# Altium PCB AimLab_TestStationD-v1 (1).~3.1-150922.~3.1-150922.PcbDoc
Units mil, origin at the board's own origin, x right, y up, seen from the top; angles counter-clockwise.
Board outline 6000 x 2640 mil, 2 copper layers (Top Layer, Bottom Layer); 2 components, 0 nets, 575 pads, 0 vias.
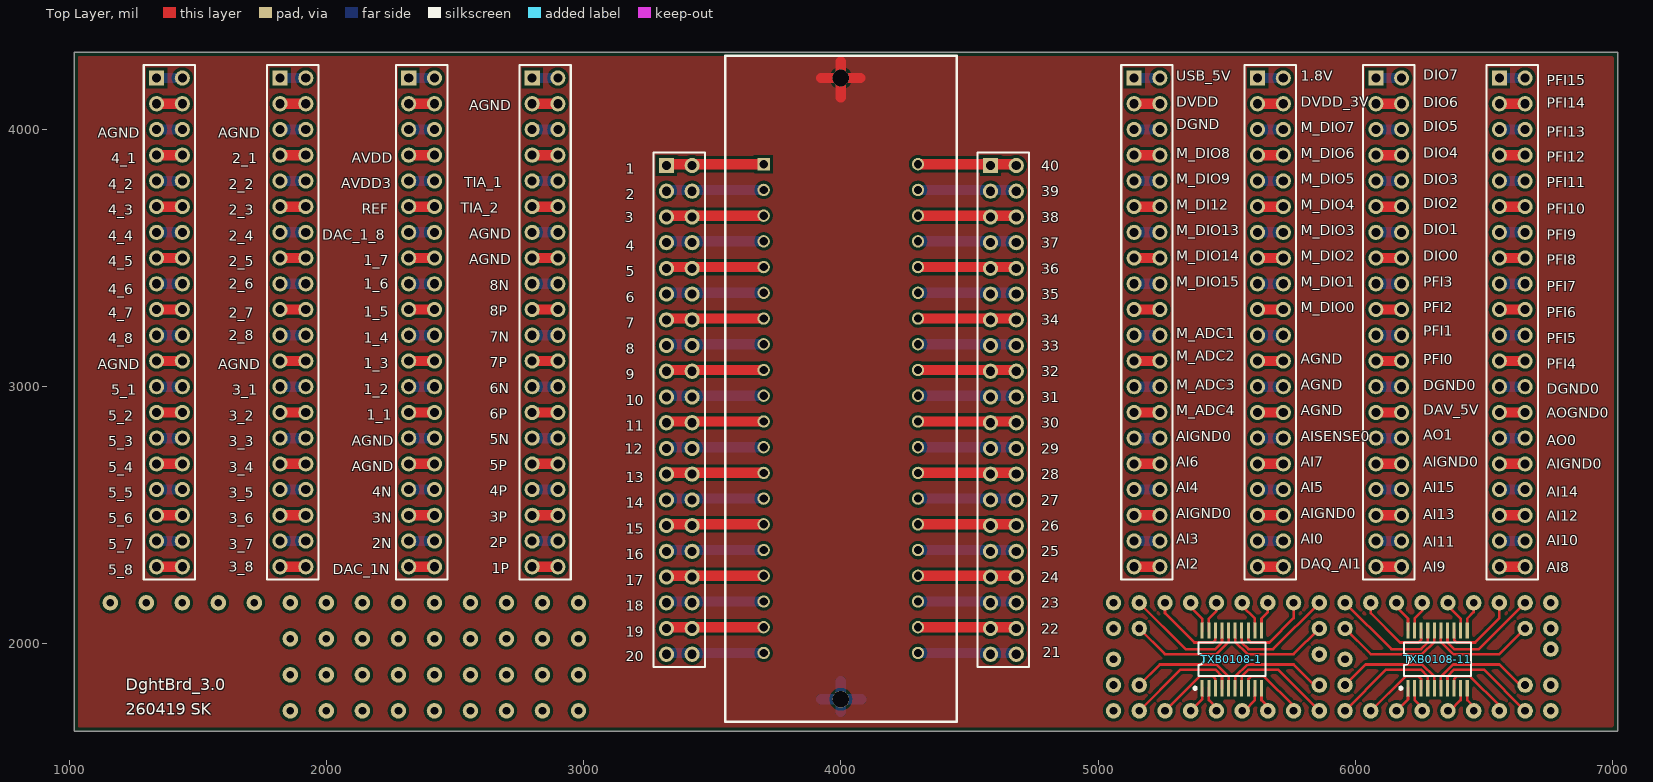
[diagram p0: Top Layer view]
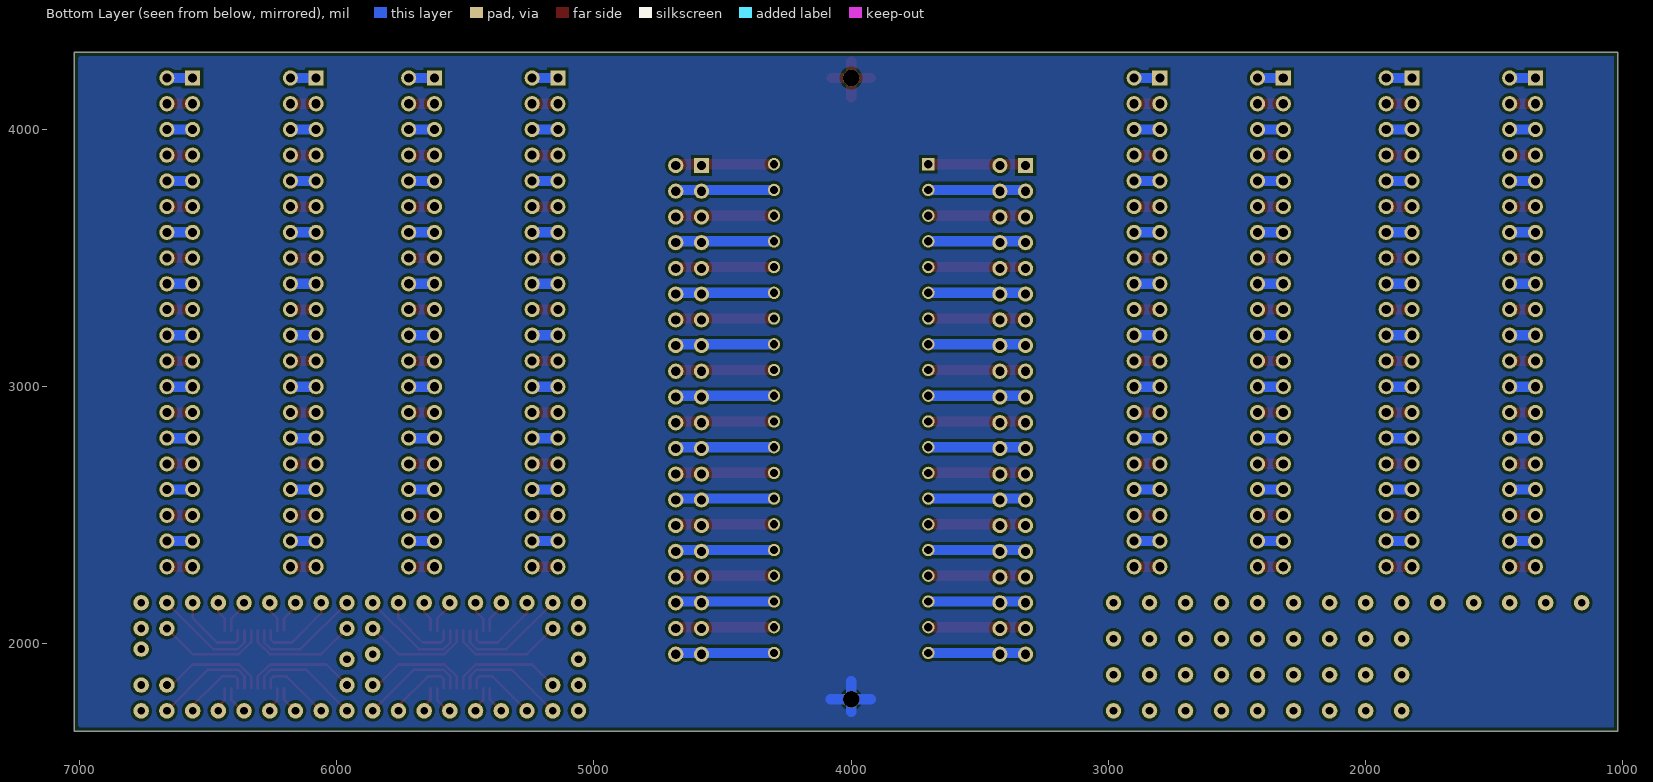
[diagram p1: Bottom Layer view, seen from below]

## Layer stack, top to bottom
Top Solder: solder mask 0.4, Solder Resist, Dk 3.5
Top Layer: signal copper 1.4
Dielectric1: core 12.6, FR-4, Dk 4.8
Bottom Layer: signal copper 1.4
Bottom Solder: solder mask 0.4, Solder Resist, Dk 3.5

## Board outline
1020,1660 7020,1660 7020,4300 1020,4300

## Design rules (kind name [scope] priority, off if disabled: settings)
Clearance [All] p1: gap=12 ignorepadtopadclearanceinfootprint=FALSE
FabricationTestPointUsage TestPointUsage [All] p1: valid=0 allowmultiple=FALSE
FabricationTestpoint Testpoint [All] p1: side=3 testpointundercomponent=TRUE minsize=40 maxsize=100 preferedsize=60 minholesize=0 maxholesize=40 preferedholesize=32 testpointgrid=1 allowsidetop=TRUE allowsidebottom=TRUE usegrid=TRUE gridtolerance=0.01
PolygonConnect [All] p1: connectstyle=Relief reliefconductorwidth=10 reliefentries=4 polygonreliefangle="90 Angle" airgapwidth=10
RoutingVias [All] p1: holewidth=28 width=50 viastyle="Through Hole" minholewidth=8 minwidth=10 maxholewidth=75 maxwidth=80
ShortCircuit [All] p1: allowed=TRUE
SolderMaskExpansion [All] p1: expansion=4 istentingtop=FALSE
Width [All] p1: maxlimit=80 minlimit=10 preferedwidth=40
27 further rules are at their usual default settings.

## Components (designator, comment, footprint, x,y, rotation, side; value= is the part's Value field where it differs from the comment)
TXB0108-1 "Translational Buffer" TSSO6x6-G20/D6.6 5520,1940 r0 top
TXB0108-11 "Translational Buffer" TSSO6x6-G20/D6.6 6320,1940 r0 top

## Footprints (in the part's own frame and the unit in brackets; to place one, negate y for a bottom-side part, rotate by r counter-clockwise, add the part's x,y. Pads: shape width x height; smd on the part's side, far side on the other; paste and mask are expansions set on the pad)
TSSO6x6-G20/D6.6 [mm] "Shrink Small Outline; 20 Leads; Body Width 4.4 mm; Pitch 0.65 mm"
  rect 0.3x1.6 smd: 1(-2.925,-2.85) 2(-2.275,-2.85) 3(-1.625,-2.85) 4(-0.975,-2.85) 5(-0.325,-2.85) 6(0.325,-2.85) 7(0.975,-2.85) 8(1.625,-2.85) 9(2.275,-2.85) 10(2.925,-2.85) 11(2.925,2.85) 12(2.275,2.85) 13(1.625,2.85) 14(0.975,2.85) 15(0.325,2.85) 16(-0.325,2.85) 17(-0.975,2.85) 18(-1.625,2.85) 19(-2.275,2.85) 20(-2.925,2.85)
  silkscreen extent -3.75,-2.97 3.3,1.65

## Free pads (board coordinates)
  round 60 hole 30: 0(1160,2160) 0(5160,1740) 0(5160,1840) 0(5160,2060) 0(5160,2160) 0(5960,1740) 0(5960,1840) 0(5960,2060) 0(5960,2160) 1(1300,2160) 1(5260,1740) 1(5260,2160) 1(6060,1740) 1(6060,2160) 2(1440,2160) 2(5360,1740) 2(5360,2160) 2(6160,1740) 2(6160,2160) 4(1580,2160) 4(5460,1740) 4(5460,2160) 4(6260,1740) 4(6260,2160) 5(1720,2160) 5(5560,1740) 5(5560,2160) 5(6360,1740) 5(6360,2160) 6(1860,1740) 6(1860,1880) 6(1860,2020) 6(1860,2160) 6(5660,1740) 6(5660,2160) 6(6460,1740) 6(6460,2160) 7(2000,1740) 7(2000,1880) 7(2000,2020) 7(2000,2160) 7(5760,1740) 7(5760,2160) 7(6560,1740) 7(6560,2160) 8(2140,1740) 8(2140,1880) 8(2140,2020) 8(2140,2160) 8(5060,1740) 8(5060,2160) 8(5860,1740) 8(5860,2160) 8(6660,1740) 8(6660,2160) 8(6760,1740) 8(6760,2160) 9(2280,1740) 9(2280,1880) 9(2280,2020) 9(2280,2160) 9(5060,1840) 9(5060,1940) 9(5060,2060) 9(5860,1840) 9(5860,1960) 9(5860,2060) 9(5960,1940) 9(6660,1840) 9(6660,2060) 9(6760,1840) 9(6760,1980) 9(6760,2060) 10(2420,1740) 10(2420,1880) 10(2420,2020) 10(2420,2160) 11(2560,1740) 11(2560,1880) 11(2560,2020) 11(2560,2160) 12(2700,1740) 12(2700,1880) 12(2700,2020) 12(2700,2160) 13(2840,1740) 13(2840,1880) 13(2840,2020) 13(2840,2160) 14(2980,1740) 14(2980,1880) 14(2980,2020) 14(2980,2160)
  rect 59.06x59.06 hole 35.43: 1(1340,4200) 1(1820,4200) 1(2320,4200) 1(2800,4200) 1(3321.87,3859.96) 1(4581.87,3859.96) 1(5140,4200) 1(5620,4200) 1(6080,4200) 1(6560,4200)
  rect 48x48 hole 32: 1(3700,3865)
  round 59.06 hole 35.43: 2(1440,4200) 2(1920,4200) 2(2420,4200) 2(2900,4200) 2(3421.87,3859.96) 2(4681.87,3859.96) 2(5240,4200) 2(5720,4200) 2(6180,4200) 2(6660,4200) 3(1340,4100) 3(1820,4100) 3(2320,4100) 3(2800,4100) 3(3321.87,3759.96) 3(4581.87,3759.96) 3(5140,4100) 3(5620,4100) 3(6080,4100) 3(6560,4100) 4(1440,4100) 4(1920,4100) 4(2420,4100) 4(2900,4100) 4(3421.87,3759.96) 4(4681.87,3759.96) 4(5240,4100) 4(5720,4100) 4(6180,4100) 4(6660,4100) 5(1340,4000) 5(1820,4000) 5(2320,4000) 5(2800,4000) 5(3321.87,3659.96) 5(4581.87,3659.96) 5(5140,4000) 5(5620,4000) 5(6080,4000) 5(6560,4000) 6(1440,4000) 6(1920,4000) 6(2420,4000) 6(2900,4000) 6(3421.87,3659.96) 6(4681.87,3659.96) 6(5240,4000) 6(5720,4000) 6(6180,4000) 6(6660,4000) 7(1340,3900) 7(1820,3900) 7(2320,3900) 7(2800,3900) 7(3321.87,3559.96) 7(4581.87,3559.96) 7(5140,3900) 7(5620,3900) 7(6080,3900) 7(6560,3900) 8(1440,3900) 8(1920,3900) 8(2420,3900) 8(2900,3900) 8(3421.87,3559.96) 8(4681.87,3559.96) 8(5240,3900) 8(5720,3900) 8(6180,3900) 8(6660,3900) 9(1340,3800) 9(1820,3800) 9(2320,3800) 9(2800,3800) 9(3321.87,3459.96) 9(4581.87,3459.96) 9(5140,3800) 9(5620,3800) 9(6080,3800) 9(6560,3800) 10(1440,3800) 10(1920,3800) 10(2420,3800) 10(2900,3800) 10(3421.87,3459.96) 10(4681.87,3459.96) 10(5240,3800) 10(5720,3800) 10(6180,3800) 10(6660,3800) 11(1340,3700) 11(1820,3700) 11(2320,3700) 11(2800,3700) 11(3321.87,3359.96) 11(4581.87,3359.96) 11(5140,3700) 11(5620,3700) 11(6080,3700) 11(6560,3700) 12(1440,3700) 12(1920,3700) 12(2420,3700) 12(2900,3700) 12(3421.87,3359.96) 12(4681.87,3359.96) 12(5240,3700) 12(5720,3700) 12(6180,3700) 12(6660,3700) 13(1340,3600) 13(1820,3600) 13(2320,3600) 13(2800,3600) 13(3321.87,3259.96) 13(4581.87,3259.96) 13(5140,3600) 13(5620,3600) 13(6080,3600) 13(6560,3600) 14(1440,3600) 14(1920,3600) 14(2420,3600) 14(2900,3600) 14(3421.87,3259.96) 14(4681.87,3259.96) 14(5240,3600) 14(5720,3600) 14(6180,3600) 14(6660,3600) 15(1340,3500) 15(1820,3500) 15(2320,3500) 15(2800,3500) 15(3321.87,3159.96) 15(4581.87,3159.96) 15(5140,3500) 15(5620,3500) 15(6080,3500) 15(6560,3500) 16(1440,3500) 16(1920,3500) 16(2420,3500) 16(2900,3500) 16(3421.87,3159.96) 16(4681.87,3159.96) 16(5240,3500) 16(5720,3500) 16(6180,3500) 16(6660,3500) 17(1340,3400) 17(1820,3400) 17(2320,3400) 17(2800,3400) 17(3321.87,3059.96) 17(4581.87,3059.96) 17(5140,3400) 17(5620,3400) 17(6080,3400) 17(6560,3400) 18(1440,3400) 18(1920,3400) 18(2420,3400) 18(2900,3400) 18(3421.87,3059.96) 18(4681.87,3059.96) 18(5240,3400) 18(5720,3400) 18(6180,3400) 18(6660,3400) 19(1340,3300) 19(1820,3300) 19(2320,3300) 19(2800,3300) 19(3321.87,2959.96) 19(4581.87,2959.96) 19(5140,3300) 19(5620,3300) 19(6080,3300) 19(6560,3300) 20(1440,3300) 20(1920,3300) 20(2420,3300) 20(2900,3300) 20(3421.87,2959.96) 20(4681.87,2959.96) 20(5240,3300) 20(5720,3300) 20(6180,3300) 20(6660,3300) 21(1340,3200) 21(1820,3200) 21(2320,3200) 21(2800,3200) 21(3321.87,2859.96) 21(4581.87,2859.96) 21(5140,3200) 21(5620,3200) 21(6080,3200) 21(6560,3200) 22(1440,3200) 22(1920,3200) 22(2420,3200) 22(2900,3200) 22(3421.87,2859.96) 22(4681.87,2859.96) 22(5240,3200) 22(5720,3200) 22(6180,3200) 22(6660,3200) 23(1340,3100) 23(1820,3100) 23(2320,3100) 23(2800,3100) 23(3321.87,2759.96) 23(4581.87,2759.96) 23(5140,3100) 23(5620,3100) 23(6080,3100) 23(6560,3100) 24(1440,3100) 24(1920,3100) 24(2420,3100) 24(2900,3100) 24(3421.87,2759.96) 24(4681.87,2759.96) 24(5240,3100) 24(5720,3100) 24(6180,3100) 24(6660,3100) 25(1340,3000) 25(1820,3000) 25(2320,3000) 25(2800,3000) 25(3321.87,2659.96) 25(4581.87,2659.96) 25(5140,3000) 25(5620,3000) 25(6080,3000) 25(6560,3000) 26(1440,3000) 26(1920,3000) 26(2420,3000) 26(2900,3000) 26(3421.87,2659.96) 26(4681.87,2659.96) 26(5240,3000) 26(5720,3000) 26(6180,3000) 26(6660,3000) 27(1340,2900) 27(1820,2900) 27(2320,2900) 27(2800,2900) 27(3321.87,2559.96) 27(4581.87,2559.96) 27(5140,2900) 27(5620,2900) 27(6080,2900) 27(6560,2900) 28(1440,2900) 28(1920,2900) 28(2420,2900) 28(2900,2900) 28(3421.87,2559.96) 28(4681.87,2559.96) 28(5240,2900) 28(5720,2900) 28(6180,2900) 28(6660,2900) 29(1340,2800) 29(1820,2800) 29(2320,2800) 29(2800,2800) 29(3321.87,2459.96) 29(4581.87,2459.96) 29(5140,2800) 29(5620,2800) 29(6080,2800) 29(6560,2800) 30(1440,2800) 30(1920,2800) 30(2420,2800) 30(2900,2800) 30(3421.87,2459.96) 30(4681.87,2459.96) 30(5240,2800) 30(5720,2800) 30(6180,2800) 30(6660,2800) 31(1340,2700) 31(1820,2700) 31(2320,2700) 31(2800,2700) 31(3321.87,2359.96) 31(4581.87,2359.96) 31(5140,2700) 31(5620,2700) 31(6080,2700) 31(6560,2700) 32(1440,2700) 32(1920,2700) 32(2420,2700) 32(2900,2700) 32(3421.87,2359.96) 32(4681.87,2359.96) 32(5240,2700) 32(5720,2700) 32(6180,2700) 32(6660,2700) 33(1340,2600) 33(1820,2600) 33(2320,2600) 33(2800,2600) 33(3321.87,2259.96) 33(4581.87,2259.96) 33(5140,2600) 33(5620,2600) 33(6080,2600) 33(6560,2600) 34(1440,2600) 34(1920,2600) 34(2420,2600) 34(2900,2600) 34(3421.87,2259.96) 34(4681.87,2259.96) 34(5240,2600) 34(5720,2600) 34(6180,2600) 34(6660,2600) 35(1340,2500) 35(1820,2500) 35(2320,2500) 35(2800,2500) 35(3321.87,2159.96) 35(4581.87,2159.96) 35(5140,2500) 35(5620,2500) 35(6080,2500) 35(6560,2500) 36(1440,2500) 36(1920,2500) 36(2420,2500) 36(2900,2500) 36(3421.87,2159.96) 36(4681.87,2159.96) 36(5240,2500) 36(5720,2500) 36(6180,2500) 36(6660,2500) 37(1340,2400) 37(1820,2400) 37(2320,2400) 37(2800,2400) 37(3321.87,2059.96) 37(4581.87,2059.96) 37(5140,2400) 37(5620,2400) 37(6080,2400) 37(6560,2400) 38(1440,2400) 38(1920,2400) 38(2420,2400) 38(2900,2400) 38(3421.87,2059.96) 38(4681.87,2059.96) 38(5240,2400) 38(5720,2400) 38(6180,2400) 38(6660,2400) 39(1340,2300) 39(1820,2300) 39(2320,2300) 39(2800,2300) 39(3321.87,1959.96) 39(4581.87,1959.96) 39(5140,2300) 39(5620,2300) 39(6080,2300) 39(6560,2300) 40(1440,2300) 40(1920,2300) 40(2420,2300) 40(2900,2300) 40(3421.87,1959.96) 40(4681.87,1959.96) 40(5240,2300) 40(5720,2300) 40(6180,2300) 40(6660,2300)
  round 48 hole 32: 2(4300,3865) 3(3700,3765) 4(4300,3765) 5(3700,3665) 6(4300,3665) 7(3700,3565) 8(4300,3565) 9(3700,3465) 10(4300,3465) 11(3700,3365) 12(4300,3365) 13(3700,3265) 14(4300,3265) 15(3700,3165) 16(4300,3165) 17(3700,3065) 18(4300,3065) 19(3700,2965) 20(4300,2965) 21(3700,2865) 22(4300,2865) 23(3700,2765) 24(4300,2765) 25(3700,2665) 26(4300,2665) 27(3700,2565) 28(4300,2565) 29(3700,2465) 30(4300,2465) 31(3700,2365) 32(4300,2365) 33(3700,2265) 34(4300,2265) 35(3700,2165) 36(4300,2165) 37(3700,2065) 38(4300,2065) 39(3700,1965) 40(4300,1965)
  round 65 hole 65: a(4000,4200) b(4000,1785)

## Nets (pads, with @x,y where several pads share a name; then routed paths per layer and width w, separated by ;. In a path a pad name is that pad's centre, name@x,y a point inside that pad or via, vN(x,y) a via of type N, cw(c..) or ccw(c..) an arc to the next point about the centre after c; other vN are vias at no path point)
pads on no net: TXB0108-1.1 TXB0108-1.2 TXB0108-1.3 TXB0108-1.4 TXB0108-1.5 TXB0108-1.6 TXB0108-1.7 TXB0108-1.8 TXB0108-1.9 TXB0108-1.10 TXB0108-1.11 TXB0108-1.12 TXB0108-1.13 TXB0108-1.14 TXB0108-1.15 TXB0108-1.16 TXB0108-1.17 TXB0108-1.18 TXB0108-1.19 TXB0108-1.20 TXB0108-11.1 TXB0108-11.2 TXB0108-11.3 TXB0108-11.4 TXB0108-11.5 TXB0108-11.6 TXB0108-11.7 TXB0108-11.8 TXB0108-11.9 TXB0108-11.10 TXB0108-11.11 TXB0108-11.12 TXB0108-11.13 TXB0108-11.14 TXB0108-11.15 TXB0108-11.16 TXB0108-11.17 TXB0108-11.18 TXB0108-11.19 TXB0108-11.20
copper on no net: | length 42831.7
  Top Layer w10: 5160,1740 5320,1900 5455.91,1900 5481.61,1874.29 5481.61,1827.8 ; 5160,1840 5240,1920 5460,1920 5507.2,1872.8 5507.2,1827.8 ; 5160,2060 5260,1960 5460,1960 5507.2,2007.2 5507.2,2052.2 ; 5160,2160 5340,1980 5455.91,1980 5481.61,2005.71 5481.61,2052.2 ; 5260,1740 5394.29,1874.29 5445.71,1874.29 5456.02,1863.98 5456.02,1827.8 ; 5276.14,2160 5260,2160 5260,2120 5374.29,2005.71 5445.71,2005.71 5456.02,2016.02 5456.02,2052.2 ; 5360,1740 5404.84,1784.84 5404.84,1827.8 ; 5360,2160 5360,2143.54 5404.84,2098.7 5404.84,2052.2 ; 5430.43,1827.8 5430.43,1781.3 5460,1751.73 ; 5430.43,2052.2 5430.43,2098.7 5460,2128.27 ; 5446.14,1740 5460,1740 ; 5460,2145.91 5460,2160 ; 5532.8,1827.8 5532.8,1872.8 5580,1920 5760,1920 5840,1840 5860,1840 ; 5532.8,2052.2 5532.8,2007.2 5580,1960 5760,1960 5860,2060 ; 5558.39,1827.8 5558.39,1874.29 5584.09,1900 5700,1900 5860,1740 ; 5558.39,2052.2 5558.39,2005.71 5584.09,1980 5680,1980 5860,2160 ; 5560,1754.09 5560,1740 5568.27,1740 5609.57,1781.3 5609.57,1827.8 ; 5560,2160 5560,2148.27 5609.57,2098.7 5609.57,2052.2 ; 5583.98,1827.8 5583.98,1863.98 5594.29,1874.29 5645.71,1874.29 5760,1760 5760,1740 ; 5583.98,2052.2 5583.98,2016.02 5594.29,2005.71 5665.71,2005.71 5760,2100 5760,2160 ; 5635.16,1827.8 5635.16,1781.3 5660,1756.46 ; 5635.16,2052.2 5635.16,2098.7 5660,2123.54 5660,2160 ; 5960,1740 6120,1900 6255.91,1900 6281.61,1874.29 6281.61,1827.8 ; 5960,1840 6040,1920 6260,1920 6307.2,1872.8 6307.2,1827.8 ; 5960,2060 6060,1960 6260,1960 6307.2,2007.2 6307.2,2052.2 ; 5960,2160 6140,1980 6255.91,1980 6281.61,2005.71 6281.61,2052.2 ; 6060,1740 6194.29,1874.29 6245.71,1874.29 6256.02,1863.98 6256.02,1827.8 ; 6076.14,2160 6060,2160 6060,2120 6174.29,2005.71 6245.71,2005.71 6256.02,2016.02 6256.02,2052.2 ; 6160,1740 6204.84,1784.84 6204.84,1827.8 ; 6160,2160 6160,2143.54 6204.84,2098.7 6204.84,2052.2 ; 6230.43,1827.8 6230.43,1781.3 6260,1751.73 ; 6230.43,2052.2 6230.43,2098.7 6260,2128.27 ; 6246.14,1740 6260,1740 ; 6260,2145.91 6260,2160 ; 6332.8,1827.8 6332.8,1872.8 6380,1920 6560,1920 6640,1840 6660,1840 ; 6332.8,2052.2 6332.8,2007.2 6380,1960 6560,1960 6660,2060 ; 6358.39,1827.8 6358.39,1874.29 6384.09,1900 6500,1900 6660,1740 ; 6358.39,2052.2 6358.39,2005.71 6384.09,1980 6480,1980 6660,2160 ; 6360,1754.09 6360,1740 6368.27,1740 6409.57,1781.3 6409.57,1827.8 ; 6360,2160 6360,2148.27 6409.57,2098.7 6409.57,2052.2 ; 6383.98,1827.8 6383.98,1863.98 6394.29,1874.29 6445.71,1874.29 6560,1760 6560,1740 ; 6383.98,2052.2 6383.98,2016.02 6394.29,2005.71 6465.71,2005.71 6560,2100 6560,2160 ; 6435.16,1827.8 6435.16,1781.3 6460,1756.46 ; 6435.16,2052.2 6435.16,2098.7 6460,2123.54 6460,2160 ; 5660,1756.46 5660,1740 5660,1756.46 ; 6460,1756.46 6460,1740 6460,1756.46
  Top Layer w40: 1340,2300 1440,2300 ; 1340,2500 1440,2500 ; 1340,2700 1440,2700 ; 1340,2900 1440,2900 ; 1340,3100 1440,3100 ; 1340,3300 1440,3300 ; 1340,3500 1440,3500 ; 1340,3700 1440,3700 ; 1340,3900 1440,3900 ; 1340,4100 1440,4100 ; 1820,2300 1920,2300 ; 1820,2500 1920,2500 ; 1820,2700 1920,2700 ; 1820,2900 1920,2900 ; 1820,3100 1920,3100 ; 1820,3300 1920,3300 ; 1820,3500 1920,3500 ; 1820,3700 1920,3700 ; 1820,3900 1920,3900 ; 1820,4100 1920,4100 ; 2320,2300 2420,2300 ; 2320,2500 2420,2500 ; 2320,2700 2420,2700 ; 2320,2900 2420,2900 ; 2320,3100 2420,3100 ; 2320,3300 2420,3300 ; 2320,3500 2420,3500 ; 2320,3700 2420,3700 ; 2320,3900 2420,3900 ; 2320,4100 2420,4100 ; 2800,2300 2900,2300 ; 2800,2500 2900,2500 ; 2800,2700 2900,2700 ; 2800,2900 2900,2900 ; 2800,3100 2900,3100 ; 2800,3300 2900,3300 ; 2800,3500 2900,3500 ; 2800,3700 2900,3700 ; 2800,3900 2900,3900 ; 2800,4100 2900,4100 ; 3326.91,2065 3700,2065 ; 3326.91,2265 3700,2265 ; 3326.91,2465 3700,2465 ; 3326.91,2665 3700,2665 ; 3326.91,2865 3700,2865 ; 3326.91,3065 3700,3065 ; 3326.91,3265 3700,3265 ; 3326.91,3465 3700,3465 ; 3326.91,3665 3700,3665 ; 3326.91,3865 3700,3865 ; 3924,4200 4000,4200 ; 4000,4124 4000,4200 ; 4000,4264 4000,4200 ; 4076,4200 4000,4200 ; 4300,2065 4673.09,2065 ; 4300,2265 4673.09,2265 ; 4300,2465 4673.09,2465 ; 4300,2665 4673.09,2665 ; 4300,2865 4673.09,2865 ; 4300,3065 4673.09,3065 ; 4300,3265 4673.09,3265 ; 4300,3465 4673.09,3465 ; 4300,3665 4673.09,3665 ; 4300,3865 4673.09,3865 ; 5140,2300 5240,2300 ; 5140,2500 5240,2500 ; 5140,2700 5240,2700 ; 5140,2900 5240,2900 ; 5140,3100 5240,3100 ; 5140,3300 5240,3300 ; 5140,3500 5240,3500 ; 5140,3700 5240,3700 ; 5140,3900 5240,3900 ; 5140,4100 5240,4100 ; 5620,2300 5720,2300 ; 5620,2500 5720,2500 ; 5620,2700 5720,2700 ; 5620,2900 5720,2900 ; 5620,3100 5720,3100 ; 5620,3300 5720,3300 ; 5620,3500 5720,3500 ; 5620,3700 5720,3700 ; 5620,3900 5720,3900 ; 5620,4100 5720,4100 ; 6080,2300 6180,2300 ; 6080,2500 6180,2500 ; 6080,2700 6180,2700 ; 6080,2900 6180,2900 ; 6080,3100 6180,3100 ; 6080,3300 6180,3300 ; 6080,3500 6180,3500 ; 6080,3700 6180,3700 ; 6080,3900 6180,3900 ; 6080,4100 6180,4100 ; 6560,2300 6660,2300 ; 6560,2500 6660,2500 ; 6560,2700 6660,2700 ; 6560,2900 6660,2900 ; 6560,3100 6660,3100 ; 6560,3300 6660,3300 ; 6560,3500 6660,3500 ; 6560,3700 6660,3700 ; 6560,3900 6660,3900 ; 6560,4100 6660,4100
  Bottom Layer w40: 1340,2400 1440,2400 ; 1340,2600 1440,2600 ; 1340,2800 1440,2800 ; 1340,3000 1440,3000 ; 1340,3200 1440,3200 ; 1340,3400 1440,3400 ; 1340,3600 1440,3600 ; 1340,3800 1440,3800 ; 1340,4000 1440,4000 ; 1340,4200 1440,4200 ; 1820,2400 1920,2400 ; 1820,2600 1920,2600 ; 1820,2800 1920,2800 ; 1820,3000 1920,3000 ; 1820,3200 1920,3200 ; 1820,3400 1920,3400 ; 1820,3600 1920,3600 ; 1820,3800 1920,3800 ; 1820,4000 1920,4000 ; 1820,4200 1920,4200 ; 2320,2400 2420,2400 ; 2320,2600 2420,2600 ; 2320,2800 2420,2800 ; 2320,3000 2420,3000 ; 2320,3200 2420,3200 ; 2320,3400 2420,3400 ; 2320,3600 2420,3600 ; 2320,3800 2420,3800 ; 2320,4000 2420,4000 ; 2320,4200 2420,4200 ; 2800,2400 2900,2400 ; 2800,2600 2900,2600 ; 2800,2800 2900,2800 ; 2800,3000 2900,3000 ; 2800,3200 2900,3200 ; 2800,3400 2900,3400 ; 2800,3600 2900,3600 ; 2800,3800 2900,3800 ; 2800,4000 2900,4000 ; 2800,4200 2900,4200 ; 3326.91,1965 3700,1965 ; 3326.91,2165 3700,2165 ; 3326.91,2365 3700,2365 ; 3326.91,2565 3700,2565 ; 3326.91,2765 3700,2765 ; 3326.91,2965 3700,2965 ; 3326.91,3165 3700,3165 ; 3326.91,3365 3700,3365 ; 3326.91,3565 3700,3565 ; 3326.91,3765 3700,3765 ; 3923,1785 4000,1785 ; 4000,1735.5 4000,1785 ; 4000,1856 4000,1785 ; 4079,1785 4000,1785 ; 4300,1965 4673.09,1965 ; 4300,2165 4673.09,2165 ; 4300,2365 4673.09,2365 ; 4300,2565 4673.09,2565 ; 4300,2765 4673.09,2765 ; 4300,2965 4673.09,2965 ; 4300,3165 4673.09,3165 ; 4300,3365 4673.09,3365 ; 4300,3565 4673.09,3565 ; 4300,3765 4673.09,3765 ; 5140,2400 5240,2400 ; 5140,2600 5240,2600 ; 5140,2800 5240,2800 ; 5140,3000 5240,3000 ; 5140,3200 5240,3200 ; 5140,3400 5240,3400 ; 5140,3600 5240,3600 ; 5140,3800 5240,3800 ; 5140,4000 5240,4000 ; 5140,4200 5240,4200 ; 5620,2400 5720,2400 ; 5620,2600 5720,2600 ; 5620,2800 5720,2800 ; 5620,3000 5720,3000 ; 5620,3200 5720,3200 ; 5620,3400 5720,3400 ; 5620,3600 5720,3600 ; 5620,3800 5720,3800 ; 5620,4000 5720,4000 ; 5620,4200 5720,4200 ; 6080,2400 6180,2400 ; 6080,2600 6180,2600 ; 6080,2800 6180,2800 ; 6080,3000 6180,3000 ; 6080,3200 6180,3200 ; 6080,3400 6180,3400 ; 6080,3600 6180,3600 ; 6080,3800 6180,3800 ; 6080,4000 6180,4000 ; 6080,4200 6180,4200 ; 6560,2400 6660,2400 ; 6560,2600 6660,2600 ; 6560,2800 6660,2800 ; 6560,3000 6660,3000 ; 6560,3200 6660,3200 ; 6560,3400 6660,3400 ; 6560,3600 6660,3600 ; 6560,3800 6660,3800 ; 6560,4000 6660,4000 ; 6560,4200 6660,4200

## Polygon pours and split planes (outlines as drawn)
no net on Bottom Layer "Bottom Layer-No Net" (hatched 90Degree grid 4 track 10, remove dead copper, pour order 1): 1040,4280 7000,4280 7000,1680 1040,1680
no net on Top Layer "Top Layer-No Net" (hatched 90Degree grid 4 track 10, remove dead copper, pour order 0): 1040,4280 7000,4280 7000,1680 1040,1680

## Silkscreen, mask and mechanical layers (free items; w line width, h text height)
Top Overlay:
  lines w7.87: 1290,2250 1490,2250 1490,4250 1290,4250 1290,2250 ; 1770,2250 1970,2250 1970,4250 1770,4250 1770,2250 ; 2270,2250 2270,4250 2470,4250 2470,2250 2270,2250 ; 2750,2250 2950,2250 2950,4250 2750,4250 2750,2250 ; 3271.87,1909.96 3471.87,1909.96 3471.87,3909.96 3271.87,3909.96 3271.87,1909.96 ; 4531.87,1909.96 4731.87,1909.96 4731.87,3909.96 4531.87,3909.96 4531.87,1909.96 ; 5090,2250 5090,4250 5290,4250 5290,2250 5090,2250 ; 5570,2250 5770,2250 5770,4250 5570,4250 5570,2250 ; 6030,2250 6030,4250 6230,4250 6230,2250 6030,2250 ; 6510,2250 6710,2250 6710,4250 6510,4250 6510,2250
  lines w10: 3550,1697 4450,1697 4450,4287 3550,4287 3550,1697
  text "DIO7" at 6264.17,4192.44 h39.37
  text "USB_5V" at 5303.98,4188.78 h40
  text "1.8V" at 5787.52,4188.78 h40
  text "PFI15" at 6744.33,4171.46 h39.37
  text "DVDD" at 5303.98,4088.78 h40
  text "DVDD_3V" at 5787.52,4088.78 h40
  text "DIO6" at 6264.17,4087.13 h39.37
  text "PFI14" at 6744.33,4083.86 h39.37
  text "AGND" at 2555.62,4075.35 h40
  text "DGND" at 5303.98,4000 h40
  text "DIO5" at 6264.17,3992.64 h39.37
  text "M_DIO7" at 5787.52,3988.78 h40
  text "PFI13" at 6744.33,3971.65 h39.37
  text "AGND" at 1111.27,3968.27 h40
  text "AGND" at 1580.01,3968.27 h40
  text "DIO4" at 6264.17,3890.28 h39.37
  text "M_DIO8" at 5303.98,3888.78 h40
  text "M_DIO6" at 5787.52,3888.78 h40
  text "PFI12" at 6744.33,3875.2 h39.37
  text "AVDD" at 2097.68,3871.42 h40
  text "4_1" at 1164.59,3868.27 h40
  text "2_1" at 1633.33,3868.27 h40
  text "40" at 4780,3840 h40
  text "1" at 3163.98,3828.78 h40
  text "M_DIO9" at 5303.98,3788.78 h40
  text "M_DIO5" at 5787.52,3788.78 h40
  text "DIO3" at 6264.17,3787.91 h39.37
  text "TIA_1" at 2535.62,3775.35 h40
  text "PFI11" at 6744.33,3774.8 h39.37
  text "AVDD3" at 2057.69,3771.42 h40
  text "4_2" at 1151.26,3768.27 h40
  text "2_2" at 1620,3768.27 h40
  text "39" at 4780,3740 h40
  text "2" at 3163.98,3728.78 h40
  text "DIO2" at 6264.17,3694.41 h39.37
  text "M_DI12" at 5303.98,3688.78 h40
  text "M_DIO4" at 5787.52,3688.78 h40
  text "TIA_2" at 2522.29,3675.35 h40
  text "REF" at 2137.67,3671.42 h40
  text "PFI10" at 6744.33,3671.46 h39.37
  text "4_3" at 1151.26,3668.27 h40
  text "2_3" at 1620,3668.27 h40
  text "3" at 3160,3640 h40
  text "38" at 4780,3640 h40
  text "DIO1" at 6264.17,3592.05 h39.37
  text "M_DIO13" at 5303.98,3588.78 h40
  text "M_DIO3" at 5787.52,3588.78 h40
  text "AGND" at 2555.62,3575.35 h40
  text "DAC_1_8" at 1984.38,3571.42 h40
  text "PFI9" at 6744.33,3571.06 h39.37
  text "4_4" at 1151.26,3568.27 h40
  text "2_4" at 1620,3568.27 h40
  text "37" at 4780,3540 h40
  text "4" at 3163.98,3528.78 h40
  text "M_DIO14" at 5303.98,3488.78 h40
  text "M_DIO2" at 5787.52,3488.78 h40
  text "DIO0" at 6264.17,3488.7 h39.37
  text "AGND" at 2555.62,3475.35 h40
  text "PFI8" at 6744.33,3474.61 h39.37
  text "1_7" at 2144.33,3471.42 h40
  text "4_5" at 1151.26,3468.27 h40
  text "2_5" at 1620,3468.27 h40
  text "36" at 4780,3440 h40
  text "5" at 3163.98,3428.78 h40
  text "M_DIO15" at 5303.98,3388.78 h40
  text "M_DIO1" at 5787.52,3388.78 h40
  text "PFI3" at 6264.17,3389.29 h39.37
  text "2_6" at 1620,3380 h40
  text "1_6" at 2144.33,3380 h40
  text "8N" at 2635.59,3375.35 h40
  text "PFI7" at 6744.33,3371.26 h39.37
  text "4_6" at 1151.26,3360 h40
  text "35" at 4780,3340 h40
  text "6" at 3163.98,3328.78 h40
  text "PFI2" at 6264.17,3289.88 h39.37
  text "M_DIO0" at 5787.52,3288.78 h40
  text "8P" at 2635.59,3275.35 h40
  text "1_5" at 2144.33,3271.42 h40
  text "PFI6" at 6744.33,3269.88 h39.37
  text "4_7" at 1151.26,3268.27 h40
  text "2_7" at 1620,3268.27 h40
  text "34" at 4780,3240 h40
  text "7" at 3163.98,3228.78 h40
  text "PFI1" at 6264.17,3197.36 h39.37
  text "M_ADC1" at 5303.98,3188.78 h40
  text "2_8" at 1620,3180 h40
  text "7N" at 2635.59,3175.35 h40
  text "1_4" at 2144.33,3171.42 h40
  text "PFI5" at 6744.33,3169.49 h39.37
  text "4_8" at 1151.26,3168.27 h40
  text "33" at 4780,3140 h40
  text "8" at 3163.98,3128.78 h40
  text "M_ADC2" at 5303.98,3100 h40
  text "AGND" at 5787.52,3088.78 h40
  text "PFI0" at 6264.17,3088.11 h39.37
  text "7P" at 2635.59,3075.35 h40
  text "1_3" at 2144.33,3071.42 h40
  text "PFI4" at 6744.33,3070.08 h39.37
  text "AGND" at 1111.27,3068.27 h40
  text "AGND" at 1580.01,3068.27 h40
  text "32" at 4780,3040 h40
  text "9" at 3163.98,3028.78 h40
  text "M_ADC3" at 5303.98,2988.78 h40
  text "AGND" at 5787.52,2988.78 h40
  text "DGND0" at 6264.17,2985.75 h39.37
  text "6N" at 2635.59,2975.35 h40
  text "DGND0" at 6744.33,2972.64 h39.37
  text "1_2" at 2144.33,2971.42 h40
  text "5_1" at 1164.59,2968.27 h40
  text "3_1" at 1633.33,2968.27 h40
  text "31" at 4780,2940 h40
  text "10" at 3163.98,2928.78 h40
  text "DAV_5V" at 6264.17,2890.28 h39.37
  text "M_ADC4" at 5303.98,2888.78 h40
  text "AGND" at 5787.52,2888.78 h40
  text "AOGND0" at 6744.33,2880 h39.37
  text "6P" at 2635.59,2875.35 h40
  text "1_1" at 2157.66,2871.42 h40
  text "5_2" at 1151.26,2868.27 h40
  text "3_2" at 1620,2868.27 h40
  text "30" at 4780,2840 h40
  text "11" at 3163.98,2828.78 h40
  text "AO1" at 6264.17,2793.82 h39.37
  text "AIGND0" at 5303.98,2788.78 h40
  text "AISENSE0" at 5787.52,2788.78 h40
  text "5N" at 2635.59,2775.35 h40
  text "AO0" at 6744.33,2771.85 h39.37
  text "AGND" at 2097.68,2771.42 h40
  text "5_3" at 1151.26,2768.27 h40
  text "3_3" at 1620,2768.27 h40
  text "12" at 3160,2740 h40
  text "29" at 4780,2740 h40
  text "AI6" at 5303.98,2688.78 h40
  text "AI7" at 5787.52,2688.78 h40
  text "AIGND0" at 6264.17,2689.49 h39.37
  text "AIGND0" at 6744.33,2681.3 h39.37
  text "5P" at 2635.59,2675.35 h40
  text "AGND" at 2097.68,2671.42 h40
  text "5_4" at 1151.26,2668.27 h40
  text "3_4" at 1620,2668.27 h40
  text "28" at 4780,2640 h40
  text "13" at 3163.98,2628.78 h40
  text "AI4" at 5303.98,2588.78 h40
  text "AI5" at 5787.52,2588.78 h40
  text "AI15" at 6264.17,2589.09 h39.37
  text "4P" at 2635.59,2575.35 h40
  text "AI14" at 6744.33,2572.05 h39.37
  text "4N" at 2177.65,2571.42 h40
  text "5_5" at 1151.26,2568.27 h40
  text "3_5" at 1620,2568.27 h40
  text "27" at 4780,2540 h40
  text "14" at 3163.98,2528.78 h40
  text "AIGND0" at 5303.98,2488.78 h40
  text "AIGND0" at 5787.52,2488.78 h40
  text "AI13" at 6264.17,2484.76 h39.37
  text "AI12" at 6744.33,2479.53 h39.37
  text "3P" at 2635.59,2475.35 h40
  text "3N" at 2177.65,2471.42 h40
  text "5_6" at 1151.26,2468.27 h40
  text "3_6" at 1620,2468.27 h40
  text "26" at 4780,2440 h40
  text "15" at 3163.98,2428.78 h40
  text "AI3" at 5303.98,2388.78 h40
  text "AI0" at 5787.52,2388.78 h40
  text "AI10" at 6744.33,2384.06 h39.37
  text "AI11" at 6264.17,2378.46 h39.37
  text "2P" at 2635.59,2375.35 h40
  text "2N" at 2177.65,2371.42 h40
  text "5_7" at 1151.26,2368.27 h40
  text "3_7" at 1620,2368.27 h40
  text "25" at 4780,2340 h40
  text "16" at 3163.98,2328.78 h40
  text "AI2" at 5303.98,2292.72 h40
  text "DAQ_AI1" at 5786.54,2292.72 h40
  text "3_8" at 1620,2280 h40
  text "AI9" at 6264.17,2280 h40
  text "AI8" at 6744.33,2279.41 h40
  text "1P" at 2642.26,2275.35 h40
  text "DAC_1N" at 2024.37,2271.42 h40
  text "5_8" at 1151.26,2268.27 h40
  text "24" at 4780,2240 h40
  text "17" at 3163.98,2228.78 h40
  text "23" at 4780,2140 h40
  text "18" at 3163.98,2128.78 h40
  text "22" at 4780,2040 h40
  text "19" at 3163.98,2028.78 h40
  text "21" at 4783.98,1948.78 h40
  text "20" at 3162.99,1932.72 h40
  text "DghtBrd_3.0" at 1220,1820 h45
  text "260419 SK" at 1220,1724.8 h45